# Altium PCB PCB1.PcbDoc
Units mil, origin at the board's own origin, x right, y up, seen from the top; angles counter-clockwise.
Board outline 6000 x 4000 mil, 2 copper layers (Top Layer, Bottom Layer); 49 components, 32 nets, 139 pads, 0 vias.
Unrouted connection lines stored in the file: 107.
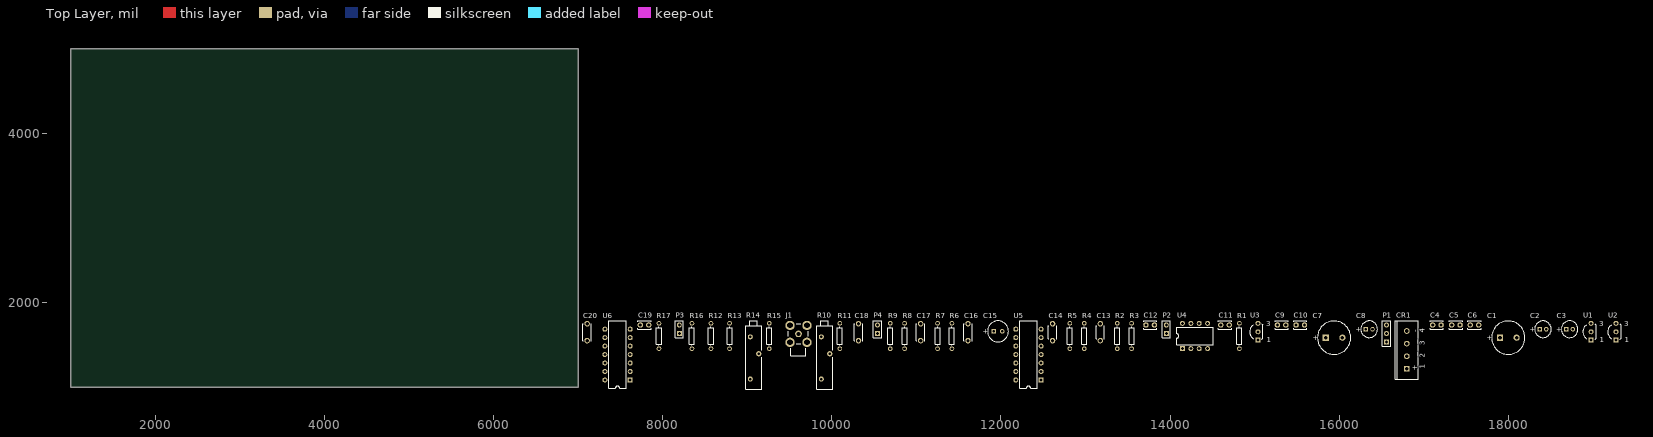
[diagram p0: Top Layer view]
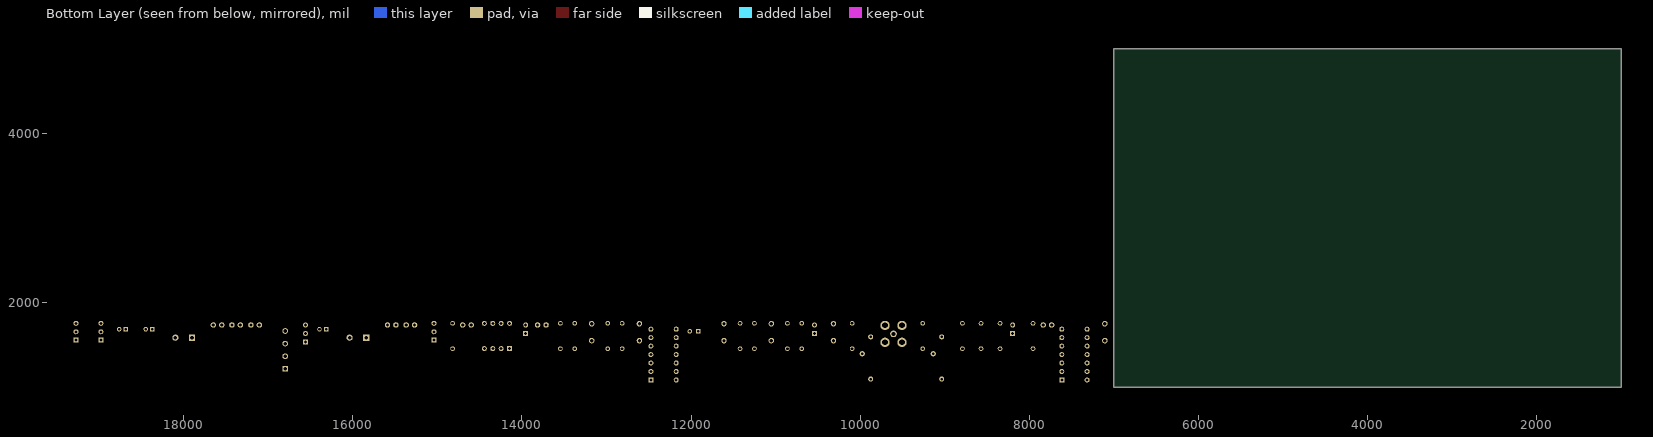
[diagram p1: Bottom Layer view, seen from below]

## Layer stack, top to bottom
Top Layer: signal copper 1.4
Dielectric: dielectric 12.6, FR-4, Dk 4.8
Bottom Layer: signal copper 1.4

## Board outline
1000,1000 7000,1000 7000,5000 1000,5000

## Design rules (kind name [scope] priority, off if disabled: settings)
Clearance [All] p1: gap=10
PolygonConnect [All] p1: connectstyle=Relief reliefconductorwidth=10 reliefentries=4 polygonreliefangle="90 Angle"
RoomDefinition esquematico [InComponentClass('esquematico')] p1: confinementstyle=ConfineIn formatcopy=TRUE lockcomponents=FALSE outline 7045,965 19425,965 19425,1895 7045,1895
RoutingVias [All] p1: holewidth=28 width=50 viastyle="Through Hole" minholewidth=28 minwidth=50 maxholewidth=28 maxwidth=50
SilkscreenOverComponentPads [All] p1: minsilkscreentomaskgap=10
SolderMaskExpansion [All] p1: expansion=4
TestPointUsage [All] p1: valid=0 allowmultiple=FALSE
Testpoint [All] p1: side=15 testpointundercomponent=TRUE minsize=40 maxsize=100 preferedsize=60 minholesize=0 maxholesize=40 preferedholesize=32 testpointgrid=1 style=1023 order=0123456789
Width [All] p1: maxlimit=10 minlimit=10 preferedwidth=10
23 further rules are at their usual default settings.

## Classes and differential pairs
net class PowerNets: +5V +12V -12V
net class HighVoltageNets: NetC1_1 NetC7_2 NetCR1_2 NetCR1_3
net class GNDNet: GND

## Components (designator, comment, footprint, x,y, rotation, side; value= is the part's Value field where it differs from the comment)
C1 "Cap Pol1" CAPPR5-10x20/H1.1 18000,1585 r0 top
C2 "Cap Pol1" CAPPR2-5x11 18410,1685 r0 top
C3 "Cap Pol1" CAPPR2-5x11 18725,1685 r0 top
C4 "Cap" CAPR2.54-4x2.5 17155,1735 r0 top
C5 "Cap" CAPR2.54-4x2.5 17380,1735 r0 top
C6 "Cap" CAPR2.54-4x2.5 17600,1735 r0 top
C7 "Cap Pol1" CAPPR5-10x20/H1.1 15940,1585 r0 top
C8 "Cap Pol1" CAPPR2-5x11 16355,1685 r0 top
C9 "Cap" CAPR2.54-4x2.5 15320,1735 r0 top
C10 "Cap" CAPR2.54-4x2.5 15540,1735 r0 top
C11 "Cap" CAPR2.54-4x2.5 14650,1735 r0 top
C12 "Cap" CAPR2.54-4x2.5 13765,1735 r0 top
C13 "Cap" CAPR5.08-4x2.5 13175,1650 r90 top
C14 "Cap" CAPR5.08-4x2.5 12610,1650 r90 top
C15 "Cap Pol1" CAPPR2.5-6.3x11 11965,1660 r0 top
C16 "Cap" CAPR5.08-5.1x2.5 11610,1650 r90 top
C17 "Cap" CAPR5.08-5.1x2.5 11050,1650 r90 top
C18 "Cap" CAPR5.08-5.1x2.5 10315,1650 r90 top
C19 "Cap" CAPR2.54-4x2.5 7785,1735 r0 top
C20 "Cap" CAPR5.08-5.1x2.5 7105,1650 r90 top
CR1 "2KBP005" D-44 16800,1440 r90 top
J1 "COAX-F" MCX5.08-H5 9605,1630 r90 top
P1 "Header 3" HDR1X3 16560,1535 r90 top
P2 "Header 2" HDR1X2 13955,1635 r90 top
P3 "Header 2" HDR1X2 8195,1635 r90 top
P4 "Header 2" HDR1X2 10540,1635 r90 top
R1 "Res1" AXIAL-0.3 14820,1605 r90 top
R2 "Res1" AXIAL-0.3 13375,1605 r90 top
R3 "Res1" AXIAL-0.3 13545,1605 r90 top
R4 "Res1" AXIAL-0.3 12985,1605 r90 top
R5 "Res1" AXIAL-0.3 12815,1605 r90 top
R6 "Res1" AXIAL-0.3 11420,1605 r90 top
R7 "Res1" AXIAL-0.3 11250,1605 r90 top
R8 "Res1" AXIAL-0.3 10860,1605 r90 top
R9 "Res1" AXIAL-0.3 10690,1605 r90 top
R10 "RTrimPot" 3006P 9875,1595 r90 top
R11 "Res1" AXIAL-0.3 10095,1605 r90 top
R12 "Res1" AXIAL-0.3 8570,1605 r90 top
R13 "Res1" AXIAL-0.3 8790,1605 r90 top
R14 "RTrimPot" 3006P 9035,1595 r90 top
R15 "Res1" AXIAL-0.3 9260,1605 r90 top
R16 "Res1" AXIAL-0.3 8345,1605 r90 top
R17 "Res1" AXIAL-0.3 7955,1605 r90 top
U1 "MC78L12ACP" BCY-W3/W 18980,1655 r0 top
U2 "MC78L05ACP" BCY-W3/W 19275,1655 r0 top
U3 "MC79L12ACP" BCY-W3/W 15040,1655 r0 top
U4 "LM2907P" P008 14295,1605 r0 top
U5 "TL084CN" DIP14 12325,1385 r90 top
U6 "TL084CN" DIP14 7465,1385 r90 top

## Footprints (in the part's own frame and the unit in brackets; to place one, negate y for a bottom-side part, rotate by r counter-clockwise, add the part's x,y. Pads: shape width x height; smd on the part's side, far side on the other; paste and mask are expansions set on the pad)
3006P [mil] "Rectangular Trimming Potentiometer 3006P"
  round 60 hole 30: 1(-500,0) 2(-200,-100) 3(0,0)
  silkscreen extent -620,-135 190,55
AXIAL-0.3 [mm] "Resistor; 2 Leads"
  round 1.4 hole 0.85: 1(-3.81,0) 2(3.81,0)
  silkscreen extent -2.77,-0.76 2.77,0.76
BCY-W3/W [mm] "TO, Flat Index; 3 In-Line, Axial Leads (Wide Pitch); Body Dia. 4.7mm; Leads 0.56 x 0.51 mm (max)"
  rect 1.5x1.5 hole 0.9: 1(0,-2.54)
  round 1.5 hole 0.9: 2(0,0) 3(0,2.54)
  silkscreen extent -2.49,-2.19 1.51,2.19
CAPPR2-5x11 [mm] "Capacitor, Electrolytic, Radial; Body 5 x 11 mm (Dia.xH typ); Pin Spacing 2 mm (typ)"
  rect 1.35x1.35 hole 0.8: 1(-1,0)
  round 1.35 hole 0.8: 2(1,0)
  silkscreen extent -2.5,-2.5 2.5,2.5
CAPPR2.5-6.3x11 [mm] "Capacitor, Electrolytic, Radial; Body 6.3 x 11 mm (Dia.xH typ); Pin Spacing 2.5 mm (typ)"
  rect 1.35x1.35 hole 0.8: 1(-1.25,0)
  round 1.35 hole 0.8: 2(1.25,0)
  silkscreen extent -3.15,-3.15 3.15,3.15
CAPPR5-10x20/H1.1 [mm] "Capacitor, Electrolytic, Radial; Body 10 x 20 mm (Dia.xH typ); Pin Spacing 5 mm (typ)"
  rect 1.85x1.85 hole 1.1: 1(-2.5,0)
  round 1.85 hole 1.1: 2(2.5,0)
  silkscreen extent -5,-5 5,5
CAPR2.54-4x2.5 [mm] "Capacitor, Ceramic, Thru-Hole, Dipped Radial; Body 4 x 2.5 mm (WxT) Pin Spacing 2.54 mm (typ)"
  round 1.65 hole 1: 1(-1.27,0) 2(1.27,0)
  silkscreen extent -2,-1.25 2,1.25
CAPR5.08-4x2.5 [mm] "Capacitor, Ceramic, Thru-Hole, Dipped Radial; Body 4 x 2.5 mm (WxT) Pin Spacing 5.08 mm (typ)"
  round 1.65 hole 1: 1(-2.54,0) 2(2.54,0)
  silkscreen extent -2,-1.25 2,1.25
CAPR5.08-5.1x2.5 [mm] "Capacitor, Ceramic, Thru-Hole, Dipped Radial; Body 5.1 x 2.5 mm (WxT) Pin Spacing 5.08 mm (typ)"
  round 1.65 hole 1: 1(-2.54,0) 2(2.54,0)
  silkscreen extent -2.55,-1.25 2.55,1.25
D-44 [mm] "SIP; 4 Leads; Body 15 x 17.5 x 6.8 mm (typ); Pitch 3.8 mm"
  rect 1.7x1.7 hole 1.1: 1(-5.7,0)
  round 1.7 hole 1.1: 2(-1.9,0) 3(1.9,0) 4(5.7,0)
  silkscreen extent -8.75,-3.4 8.75,3.4
DIP14 [mm] "DIP; 14 Leads; Row Spacing 7.62 mm; Pitch 2.54 mm"
  rect 1.5x1.5 hole 0.9: 1(-7.62,-3.81)
  round 1.5 hole 0.9: 2(-5.08,-3.81) 3(-2.54,-3.81) 4(0,-3.81) 5(2.54,-3.81) 6(5.08,-3.81) 7(7.62,-3.81) 8(7.62,3.81) 9(5.08,3.81) 10(2.54,3.81) 11(0,3.81) 12(-2.54,3.81) 13(-5.08,3.81) 14(-7.62,3.81)
  silkscreen extent -10.1,-2.65 10.1,2.65
HDR1X2 [mm] "Connector; Header; 2 Position"
  rect 1.5x1.5 hole 0.9: 1(0,0)
  round 1.5 hole 0.9: 2(2.54,0)
  silkscreen extent -1.27,-1.27 3.81,1.27
HDR1X3 [mm] "Connector; Header; 3 Position"
  rect 1.5x1.5 hole 0.9: 1(0,0)
  round 1.5 hole 0.9: 2(2.54,0) 3(5.08,0)
  silkscreen extent -1.27,-1.27 6.35,1.27
MCX5.08-H5 [mm] "Connector; RF Coaxial, MCX, Thru-Hole; 5 Position; Right-Angle"
  round 2 hole 1.2: 1(0,0)
  round 2.8 hole 1.7: 2(-2.54,-2.54) 3(2.54,-2.54) 4(2.54,2.54) 5(-2.54,2.54)
  silkscreen extent -6.5,-3 3,3
P008 [mm] "DIP; 8 Leads; Row Spacing 7.62 mm; Pitch 2.54 mm"
  rect 1.5x1.5 hole 0.9: 1(-3.81,-3.81)
  round 1.5 hole 0.9: 2(-1.27,-3.81) 3(1.27,-3.81) 4(3.81,-3.81) 5(3.81,3.81) 6(1.27,3.81) 7(-1.27,3.81) 8(-3.81,3.81)
  silkscreen extent -5.5,-2.65 5.5,2.65

## Part data
C1 C2 C3 C7 C8 C15: "Polarized Capacitor (Radial)"
C4 C5 C6 C9 C10 C11 C12 C13 C14 C16 C17 C18 C19 C20: "Capacitor"
CR1: "2 Amp Single Phase Rectifier Bridge"
J1: "RF Coaxial PCB Connector, MCX; Thru-Hole, Right-Angle Mount Socket, Blunt Post Terminal, 50 Ohm Impedance"
P1: "Header, 3-Pin"
P2 P3 P4: "Header, 2-Pin"
R1 R2 R3 R4 R5 R6 R7 R8 R9 R11 R12 R13 R15 R16 R17: "Resistor"
R10 R14: "Rectangular Trimmer Potentiometer"
U1 U2: "Three-Terminal Low Current Positive Voltage Regulator"
U3: "Three-Terminal Low Current Negative Voltage Regulator"
U4: "Frequency-To-Voltage Converters"
U5 U6: "General-Purpose J-FET Quad Operational Amplifier"

## Nets (pads, with @x,y where several pads share a name; then routed paths per layer and width w, separated by ;. In a path a pad name is that pad's centre, name@x,y a point inside that pad or via, vN(x,y) a via of type N, cw(c..) or ccw(c..) an arc to the next point about the centre after c; other vN are vias at no path point)
+5V: C3.1 C6.1 U2.1 U4.5 U4.6
+12V: C2.1 C5.1 U1.1 U2.3 U5.4 U6.4
-12V: C8.2 C10.1 U3.3 U5.11 U6.11
GND: C1.2 C2.2 C3.2 C4.2 C5.2 C6.2 C7.1 C8.1 C9.2 C10.2 C13.1 C14.2 C15.2 C16.1 C17.1 C19.2 C20.1 J1.2 J1.3 J1.4 J1.5 P1.2 P2.2 P3.2 P4.2 R4.1 R6.1 R7.1 R16.1 U1.2 U2.2 U3.1 U4.8 U5.5 U6.5
NetC1_1: C1.1 C4.1 CR1.1 U1.3
NetC7_2: C7.2 C9.1 CR1.4 U3.2
NetC11_1: C11.1 R1.2 R5.1 U5.7
NetC11_2: C11.2 R3.2 U5.6
NetC12_1: C12.1 R4.2 U5.12
NetC12_2: C12.2 P2.1
NetC13_2: C13.2 U4.2
NetC14_1: C14.1 R1.1 R2.2 R3.1
NetC15_1: C15.1 R6.2 U4.4 U4.7 U5.10
NetC16_2: C16.2 R5.2 U5.3
NetC17_2: C17.2 R7.2 U4.3
NetC18_1: C18.1 R8.2 R17.1 U6.7
NetC18_2: C18.2 R13.2 U6.6
NetC19_1: C19.1 R8.1 R12.2 R13.1
NetC20_2: C20.2 R17.2 U6.3
NetCR1_2: CR1.2 P1.1
NetCR1_3: CR1.3 P1.3
NetP3_1: P3.1 U6.10
NetR2_1: R2.1 U5.8 U5.9
NetR9_1: R9.1 R11.2 R15.2 U6.13
NetR10_2: R10.2 R10.3 R11.1
NetR12_1: R12.1 U6.8 U6.9
NetR14_2: R14.2 R14.3 R15.1
NetR16_2: R16.2 U6.12
NetU4_1: U4.1 U5.13 U5.14
VDAC: R14.1 U6.1 U6.2
VFO: R10.1 U5.1 U5.2
VOUT: J1.1 P4.1 R9.2 U6.14

## Text inside footprints (layer, text, board x,y; h text height)
C1: Top Overlay "+" at 17745.08,1555.47 h59.05
C2: Top Overlay "+" at 18253.5,1655.47 h59.05
C3: Top Overlay "+" at 18568.5,1655.47 h59.05
C7: Top Overlay "+" at 15685.08,1555.47 h59.05
C8: Top Overlay "+" at 16198.5,1655.47 h59.05
C15: Top Overlay "+" at 11782.91,1630.47 h59.06
CR1: Top Overlay "4" at 17011.81,1644.41 h59.06 r90; Top Overlay "3" at 17011.81,1494.8 h59.06 r90; Top Overlay "2" at 17011.81,1345.2 h59.06 r90; Top Overlay "1" at 17011.81,1215.59 h59.06 r90; Top Overlay "~" at 16955.12,1350.63 h59.06 r90; Top Overlay "~" at 16955.12,1502.99 h59.06 r90; Top Overlay "+" at 16921.26,1196.69 h59.06 r90; Top Overlay "-" at 16925.59,1649.45 h59.06 r90
U1: Top Overlay "3" at 19077.24,1718.78 h59.05; Top Overlay "1" at 19084.33,1530.2 h59.05
U2: Top Overlay "3" at 19372.24,1718.78 h59.05; Top Overlay "1" at 19379.33,1530.2 h59.05
U3: Top Overlay "3" at 15137.24,1718.78 h59.05; Top Overlay "1" at 15144.33,1530.2 h59.05